# EAGLE board internal_env_board (EAGLE 8.4.0)
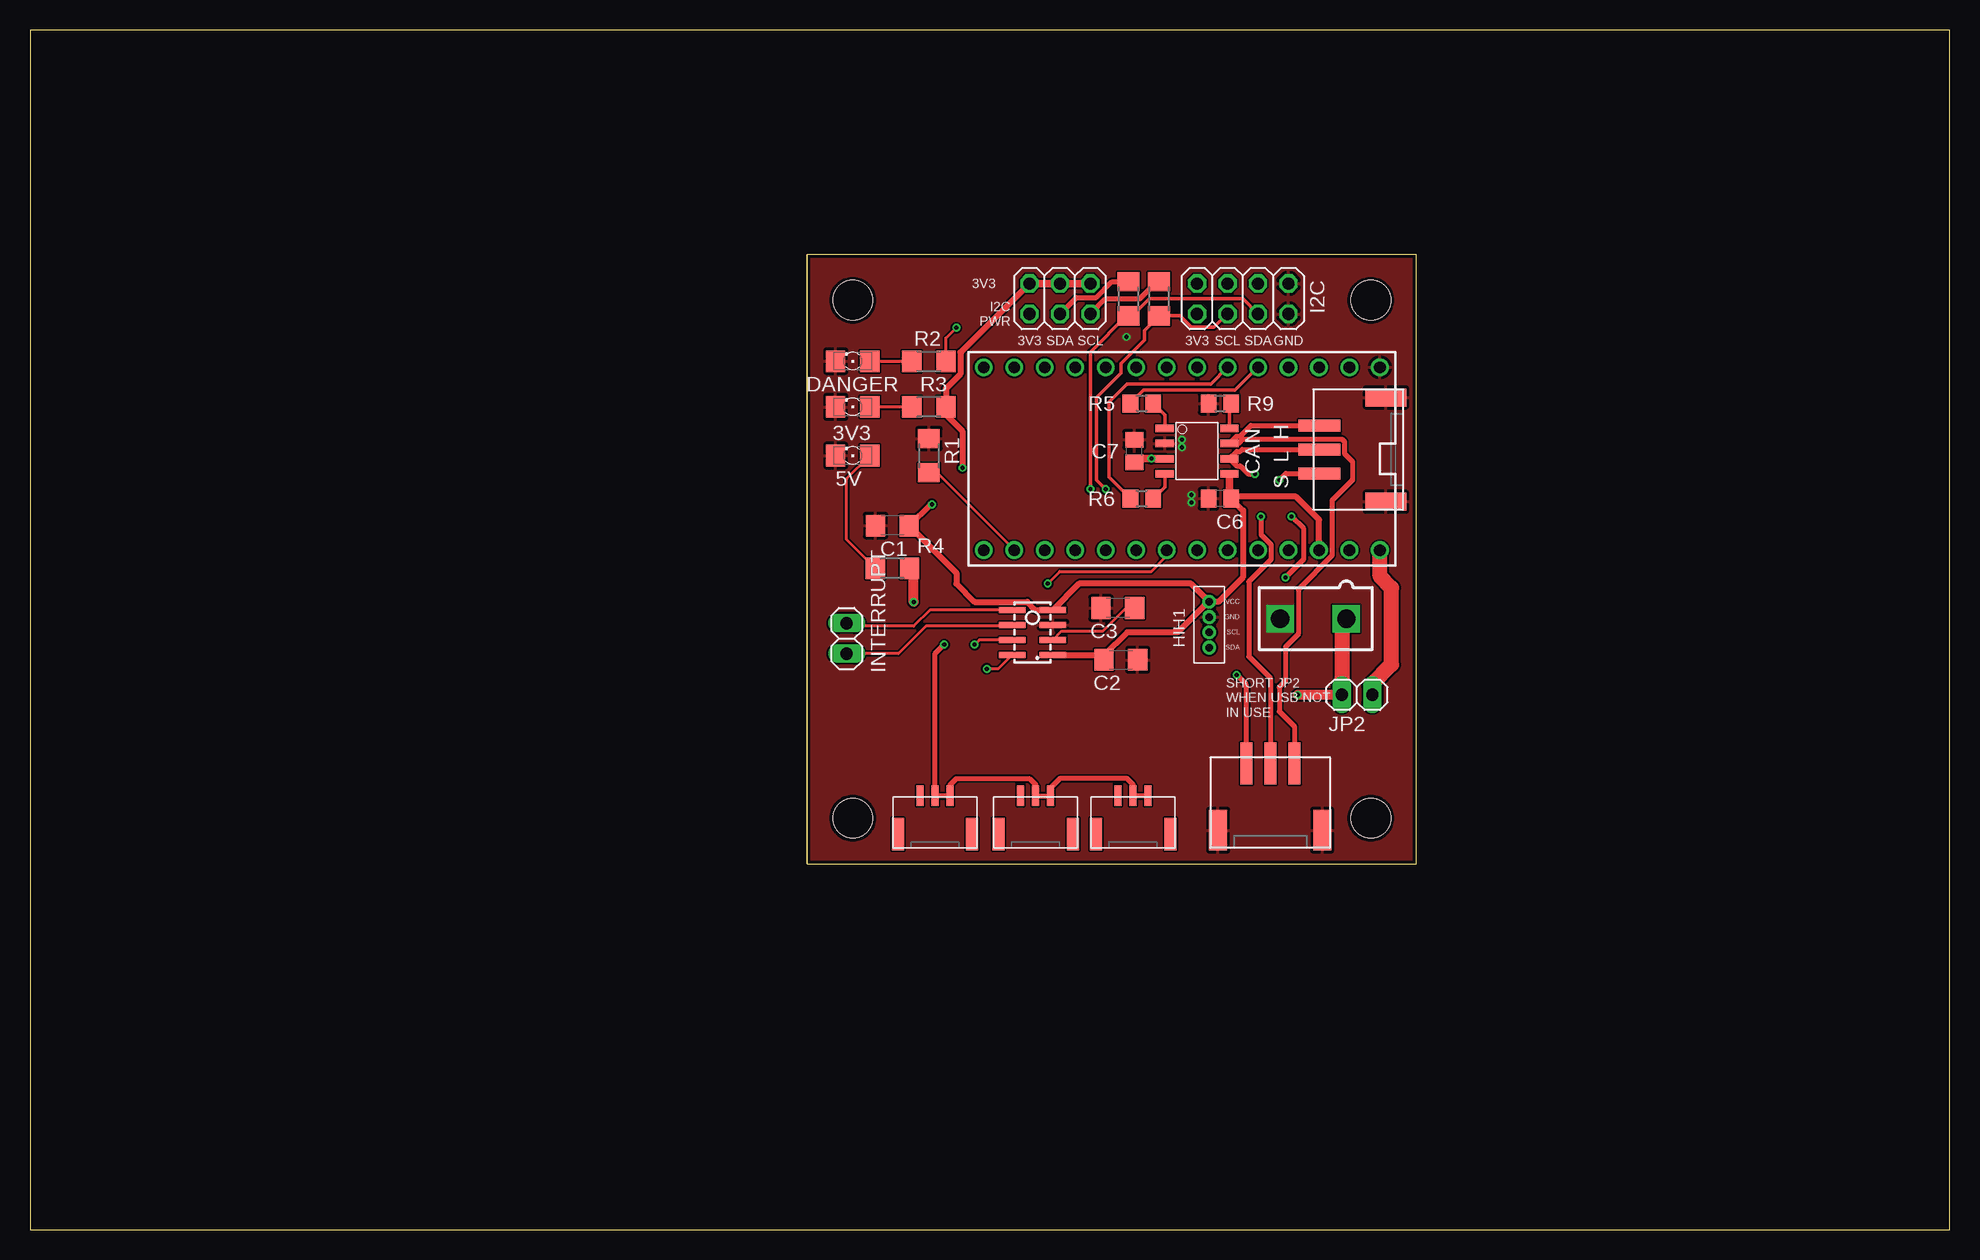
[diagram p0: board, top side]
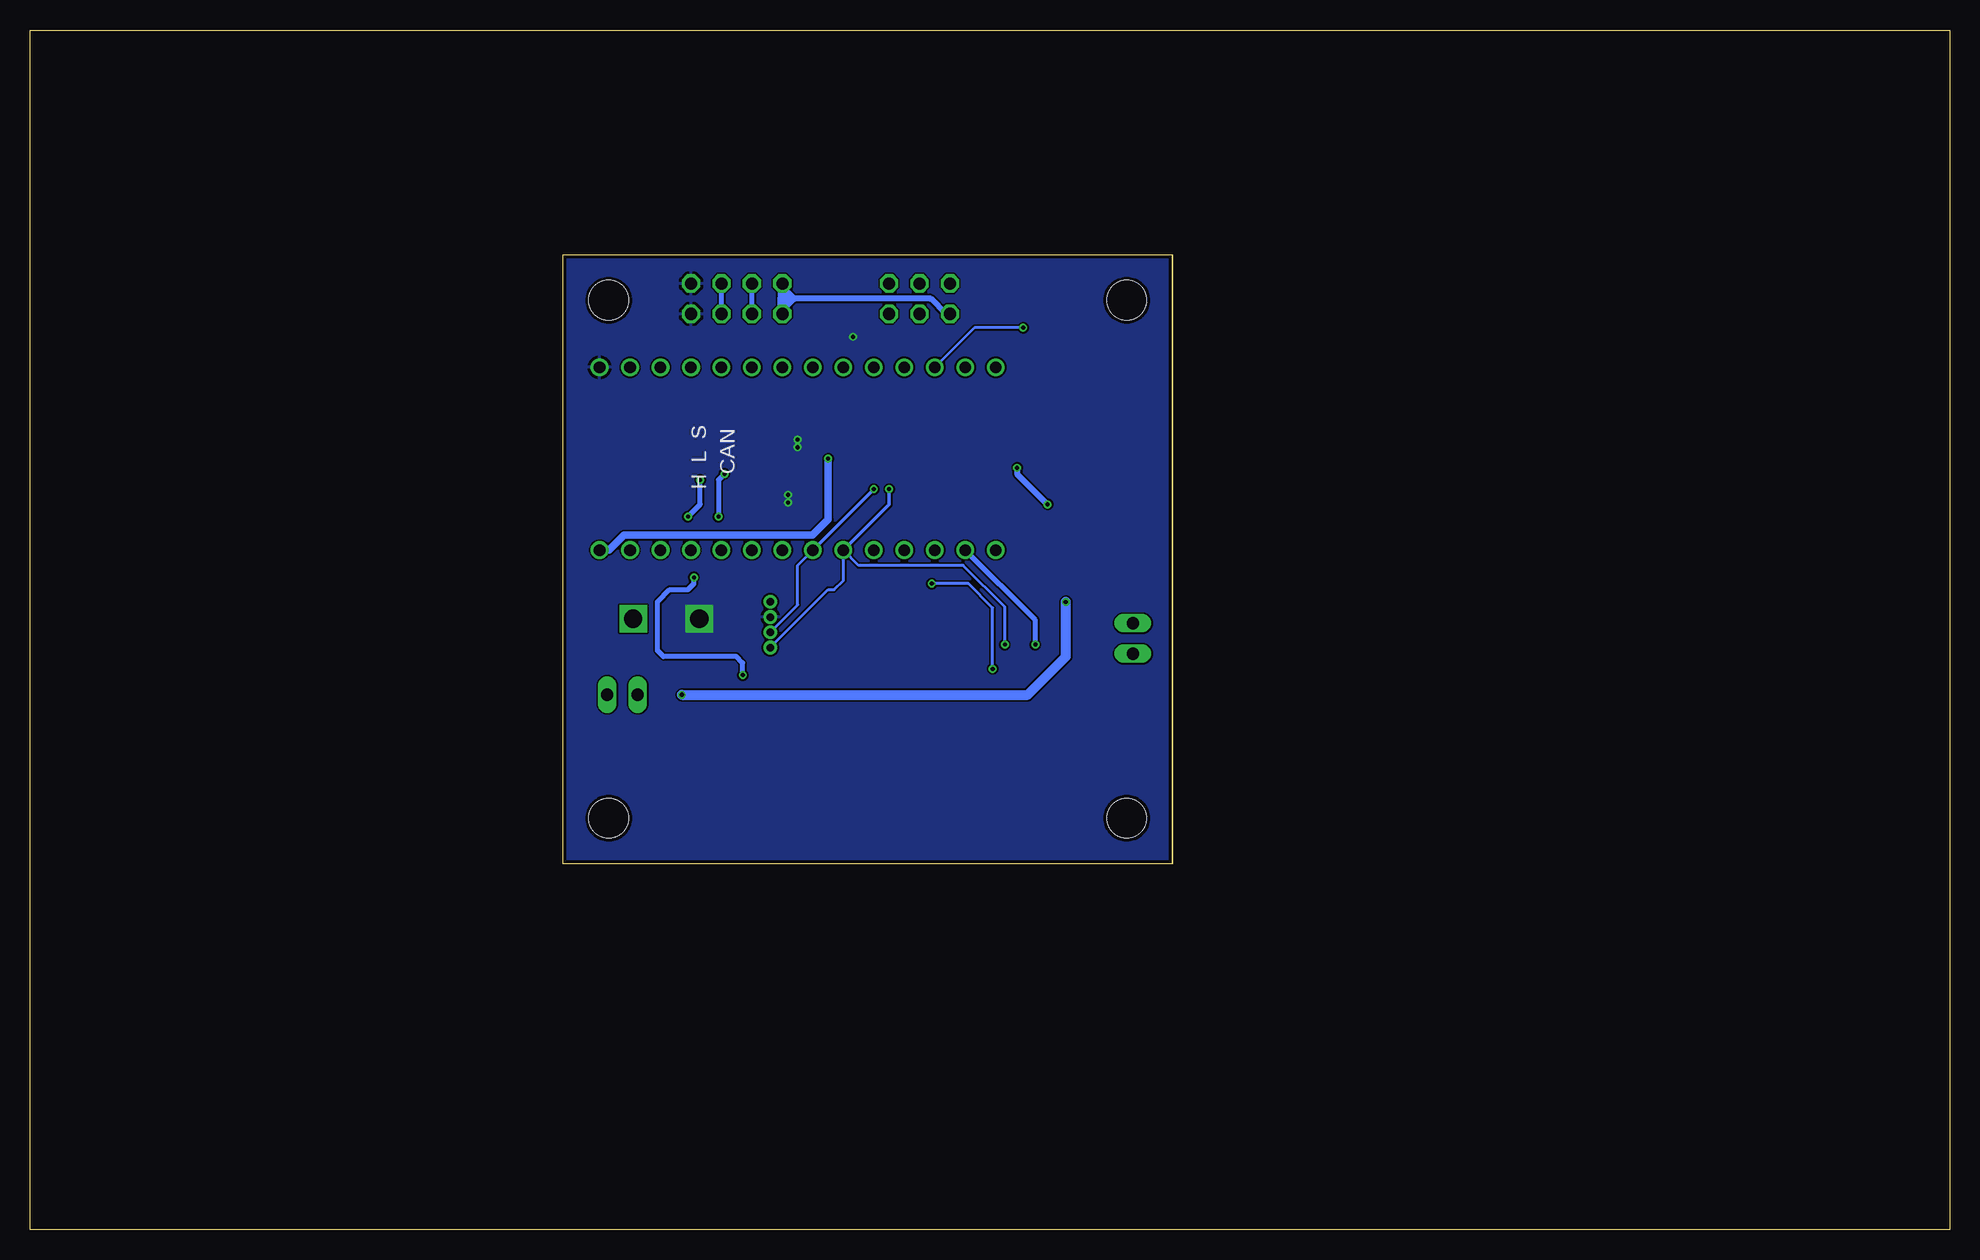
[diagram p1: board, bottom side, seen from below]

Size 160 x 100 mm. Coordinates in mm from the lower left corner, seen from the top.
Outline: 0,0 160,0 160,100 0,100 0,0
Outline: 64.77,30.48 115.57,30.48 115.57,81.28 64.77,81.28 64.77,30.48
Copper layers (1*16): Top 0.035mm / dielectric 1.5mm / Bottom 0.035mm
Design rules "ITEADstudioDRC": minimum track width 6mil, minimum drill 12mil, track to track 6mil, track to pad 6mil, pad to pad 6mil, via to via 6mil, smd to smd 0mil, copper to edge 10mil, drill to drill 10mil, minimum pad ring 10mil, minimum via ring 6mil, stop-mask expansion 2mil, vias tented up to drill 100mil, thermal gap 10mil
Net classes: 1 net1: clearance 0.203 mm to class 0
Milling: 4 lines

## Footprints (pad centres in the part's own frame; a part is rotated, then mirrored left to right if it is on the bottom)
1206 = smd 1.6 x 1.803: A -1.422,0; C 1.422,0
C1206 = smd 1.6 x 1.8: 1 -1.4,0; 2 1.4,0
C0805 = smd 1.3 x 1.5: 1 -0.95,0; 2 0.95,0
S3B-PH-SM4-TB = smd 1 x 3.5: P$1 -2,1.75; P$2 0,1.75; P$3 2,1.75 | smd 1.5 x 3.4: P$4 4.35,-3.8; P$5 -4.35,-3.8
SM03B-GHS-TB = smd 0.6 x 1.7: P$1 -1.25,0.85; P$2 0,0.85; P$3 1.25,0.85 | smd 1 x 2.7: P$4 -3.1,-2.35; P$5 3.1,-2.35
5566-2 = drill 1.524 square: 1 0,-2.756; 2 0,2.756
SIP4 = drill 0.635 pad 1.016: GND -1.27,0; SCL 0,0; SDA 1.27,0; VCC -2.54,0
1X02 = drill 1.016 long: 1 -1.27,0; 2 1.27,0
2X03 = drill 1.016 octagon: 1 -2.54,-1.27; 2 -2.54,1.27; 3 0,-1.27; 4 0,1.27; 5 2.54,-1.27; 6 2.54,1.27
2X04 = drill 1.016 octagon: 1 -3.81,-1.27; 2 -3.81,1.27; 3 -1.27,-1.27; 4 -1.27,1.27; 5 1.27,-1.27; 6 1.27,1.27; 7 3.81,-1.27; 8 3.81,1.27
R1206 = smd 1.6 x 1.803: 1 -1.422,0; 2 1.422,0
R0805 = smd 1.3 x 1.5: 1 -0.95,0; 2 0.95,0
TEENSY_3.1_BASIC_2 = drill 0.965: 0 -7.62,13.97; 1 -7.62,11.43; 2 -7.62,8.89; 3 -7.62,6.35; 3.3V 7.62,11.43; 4 -7.62,3.81; 5 -7.62,1.27; 6 -7.62,-1.27; 7 -7.62,-3.81; 8 -7.62,-6.35; 9 -7.62,-8.89; 10 -7.62,-11.43; 11 -7.62,-13.97; 12 -7.62,-16.51; 13 7.62,-16.51; 14/A0 7.62,-13.97; 15/A1 7.62,-11.43; 16/A2 7.62,-8.89; 17/A3 7.62,-6.35; 18/A4 7.62,-3.81; 19/A5 7.62,-1.27; 20/A6 7.62,1.27; 21/A7 7.62,3.81; 22/A8 7.62,6.35; 23/A9 7.62,8.89; AGND 7.62,13.97; GND -7.62,16.51; VIN 7.62,16.51
LGA8 = smd 2.2 x 0.5: 1 -1.7,1.875; 2 -1.7,0.625; 3 -1.7,-0.625; 4 -1.7,-1.875; 5 1.7,-1.875; 6 1.7,-0.625; 7 1.7,0.625; 8 1.7,1.875
SO-8 = smd 1.524 x 0.61: 1 -2.692,1.905; 2 -2.692,0.635; 3 -2.692,-0.635; 4 -2.692,-1.905; 5 2.692,-1.905; 6 2.692,-0.635; 7 2.692,0.635; 8 2.692,1.905
STAND-OFF = hole 3.302: 0,0

## Placement (x,y rotation side)
3V3  [1206]  68.58,68.58 180 top
5V  [1206]  68.58,64.52 180 top
C1  10uF  [C1206]  71.88,58.67 180 top
C2  100nF  [C1206]  90.93,47.5 0 top
C3  100nF  [C1206]  90.68,51.82 180 top
C6  10u  [C0805]  99.19,60.93 180 top
C7  10u  [C0805]  92.04,64.9 90 top
CON1  S3B-PH-SM4-TB  [S3B-PH-SM4-TB]  109.22,65.02 90 top
CON2  S3B-PH-SM4-TB  [S3B-PH-SM4-TB]  103.38,37.08 0 top
CON3  SM03B-GHS-TB  [SM03B-GHS-TB]  91.95,35.31 0 top
CON4  MOLEX_5566-2  [5566-2]  106.97,50.93 90 top
CON5  SM03B-GHS-TB  [SM03B-GHS-TB]  83.82,35.31 0 top
CON6  SM03B-GHS-TB  [SM03B-GHS-TB]  75.44,35.31 0 top
DANGER  [1206]  68.58,72.39 180 top
HIH1  HIH7120  [SIP4]  98.3,49.78 270 top
INTERRUPT  [1X02]  68.07,49.28 90 top
JP1  [2X03]  85.85,77.6 180 top
JP2  [1X02]  110.62,44.58 180 top
JP3  [2X04]  101.09,77.6 180 top
R1  80k  [R1206]  74.93,64.52 90 top
R2  51.1  [R1206]  74.93,72.39 180 top
R3  33.2  [R1206]  74.93,68.58 0 top
R4  51.1  [R1206]  71.88,55.12 0 top
R5  220  [R0805]  92.68,68.87 0 top
R6  220  [R0805]  92.68,60.93 0 top
R7  10k  [R1206]  91.57,77.6 270 top
R8  10k  [R1206]  94.11,77.6 270 top
R9  1k  [R0805]  99.19,68.87 0 top
U1  TEENSY_3.1_BASIC_2  [TEENSY_3.1_BASIC_2]  96.01,64.26 270 top
U2  MPL3115A2LGA8  [LGA8]  83.57,49.78 180 top
U4  TCAN1042HVDR  [SO-8]  97.28,64.9 0 top
U$5  [STAND-OFF]  111.76,34.29 0 top
U$6  [STAND-OFF]  68.58,34.29 0 top
U$7  [STAND-OFF]  68.58,77.47 0 top
U$8  [STAND-OFF]  111.76,77.47 0 top

## Library data of the parts
3V3 5V DANGER = adafruit
C1-C3 C6 C7 R5-R9 = rcl
CON1-CON6 U4 = ARVP
HIH1 = HIH7120
INTERRUPT JP1-JP3 = pinhead
R1-R4 = resistor
U1 = Teensy_3_Series_Board_v1.0
U2 = SparkFun-Sensors
U$5-U$8 = SparkFun

## Nets
+3V3: C1.1 C2.1 C6.1 HIH1.VCC JP1.1 JP1.3 JP1.5 R3.2 U1.3.3V U2.1 U2.4 U4.5
+5V: CON4.1 JP2.2 R4.2
AGND: U1.AGND
CAN_RX1: R6.2 U4.4
CAN_RX_T: R6.1 U1.4
CAN_TX2: R5.2 U4.1
CAN_TX_T: R5.1 U1.3
CANH1: CON1.P$3 CON2.P$3 U4.7
CANL1: CON1.P$2 CON2.P$2 U4.6
CAP: C3.1 U2.2
GND: 3V3.C 5V.C C1.2 C2.2 C3.2 C6.2 C7.2 CON1.P$4 CON1.P$5 CON2.P$4 CON2.P$5 CON4.2 DANGER.C HIH1.GND JP3.1 JP3.2 R1.2 R9.1 U1.GND U2.3 U4.2
I2C_3V1: JP1.6 JP3.7 JP3.8
INT1: INTERRUPT.1 U2.6
INT2: INTERRUPT.2 U2.5
LEAK_IN: CON3.P$2 CON3.P$3 CON5.P$2 CON5.P$3 CON6.P$2 CON6.P$3 R1.1 U1.14/A0
LED_D: R2.1 U1.10
N$1: CON1.P$1 CON2.P$1
N$2: DANGER.A R2.2
N$4: 5V.A R4.1
N$17: 3V3.A R3.1
SCL: HIH1.SCL JP3.5 JP3.6 R8.2 U1.19/A5 U2.8
SCL_3V1: JP1.2 R8.1
SDA: HIH1.SDA JP3.3 JP3.4 R7.2 U1.18/A4 U2.7
SDA_3V1: JP1.4 R7.1
STB1: R9.2 U4.8
VIN: C7.1 JP2.1 U1.VIN U4.3

## Tracks (layer width: path | path; a pad name or v marks a point on that pad's centre or on a via)
+3V3  (via drill 0.35)
  Top 0.508: C6.1 101.12,59.94 101.09,59.91 101.09,54.36 99.06,52.32 HIH1.VCC | HIH1.VCC 98.01,52.03 97.89,52.03 95.64,49.78 91.44,49.78 89.53,47.88 C2.1 89.12,47.91 U2.1 | HIH1.VCC 96.77,53.85 87.45,53.85 U2.4 83.79,51.66 83.13,52.31 78.75,52.31 77.22,53.85 77.22,54.74 C1.1 75.06,60.45 v75.18,60.45 | JP1.5 77.56,73.11 77.56,71.32 76.35,70.11 R3.2 76.35,67.92 77.72,66.55 v77.72,63.5 | 99.97,61.09 105.53,61.09 107.44,59.18 107.44,56.9
  Top 0.61: JP1.5 JP1.3 JP1.1 | 99.97,61.09 U4.5 | 99.97,61.09 C6.1 | 99.97,60.94 99.97,61.09 | 107.44,57.28 107.44,56.9 U1.3.3V
  Bottom 0.508: v77.72,63.5 77.72,62.99 v75.18,60.45
+5V  (via drill 0.35)
  Top 0.813: JP2.2 v105.66,44.58 | v73.66,52.32 73.66,54.76 R4.2
  Top 1.27: JP2.2 109.35,50.55 CON4.1
  Bottom 0.813: v73.66,52.32 73.66,47.75 76.83,44.58 v105.66,44.58
CAN_RX1
  Top 0.305: U4.4 94.59,61.89 R6.2
CAN_RX_T
  Top 0.305: U1.4 98.42,70.48 91.44,70.48 89.93,68.97 89.93,62.73 R6.1
CAN_TX2
  Top 0.305: U4.1 94.59,67.9 R5.2
CAN_TX_T
  Top 0.305: U1.3 100.45,69.97 92.83,69.97 92.62,69.76 R5.1
CANH1
  Top 0.406: CON1.P$3 101.77,67.02 100.88,66.14 100.58,66.14 U4.7 100.75,65.53 101.1,65.88 109.37,65.88 109.58,65.67 109.58,64.67 110.24,64.01 110.24,62.48 108.53,60.78 108.53,56.19 105.71,53.36 105.71,49.64 104.65,48.58 104.65,45.72 104.14,45.21 104.14,43.18 105.38,41.94 CON2.P$3
CANL1  (via drill 0.35)
  Top 0.406: CON1.P$2 101.04,65.02 100.88,64.87 100.58,64.87 U4.6 100.58,63.65 100.88,63.65 101.54,62.99 v102.11,62.99 | v102.62,59.44 102.62,57.93 103.45,57.09 103.45,55.86 101.6,54 101.6,47.75 103.38,45.97 CON2.P$2
  Bottom 0.406: v102.11,62.99 102.62,62.48 v102.62,59.44
CAP
  Top 0.254: U2.2 85.99,49.88 89.44,49.88 91.37,51.82 C3.1
GND  (via drill 0.35)
  other vias: 96.81,61.25 96.81,60.61 96.01,65.85 96.01,65.21 91.41,74.42
  pour Bottom (rank 2): 65.09,30.8 115.25,30.8 115.25,80.96 65.09,80.96
  pour Top (rank 3): 65.09,30.8 115.25,30.8 115.25,80.96 65.09,80.96
  pour Top (no thermals): 106.33,49.5 106.33,52.36 102.2,52.36 102.2,49.5
  pour Bottom (no thermals): 106.33,49.5 106.33,52.36 102.2,52.36 102.2,49.5
I2C_3V1
  Bottom 0.508: JP1.6 83.63,76.33 84.9,77.6 97.28,77.6 | 97.28,78.55 96.33,77.6 97.28,76.64
  Bottom 0.813: JP3.7 97.28,78.55 97.28,77.6 97.28,76.64 JP3.8
INT1
  Top 0.254: U2.6 81.75,50.29 74.68,50.29 72.39,48.01 INTERRUPT.1
INT2
  Top 0.254: U2.5 75.03,51.66 73.66,50.29 68.33,50.29 INTERRUPT.2
LEAK_IN  (via drill 0.35)
  Top 0.254: 75.59,63.09 U1.14/A0
  Top 0.406: CON3.P$3 CON3.P$2 91.95,37.08 91.44,37.59 85.85,37.59 85.07,36.81 CON5.P$3 CON5.P$2 83.82,37.08 83.31,37.59 77.22,37.59 76.69,37.06 CON6.P$3 CON6.P$2 75.44,48.01 v76.2,48.77
  Top 0.508: R1.1 75.59,63.09
  Bottom 0.406: v76.2,48.77 76.2,50.8 U1.14/A0
LED_D  (via drill 0.35)
  Top 0.254: R2.1 76.35,74.32 v77.22,75.18
  Bottom 0.254: v77.22,75.18 81.28,75.18 U1.10
N$1  (via drill 0.35)
  Top 0.406: CON2.P$1 101.38,45.43 v100.58,46.23 | v104.65,54.36 106.17,55.88 106.17,58.42 v105.16,59.44 | CON1.P$1 104.68,63.02 v104.14,62.48
  Bottom 0.406: v100.58,46.23 100.58,47.24 101.09,47.75 107.19,47.75 107.7,48.26 107.7,52.32 106.68,53.34 105.16,53.34 104.65,53.85 v104.65,54.36 | v105.16,59.44 104.14,60.45 v104.14,62.48
N$2
  Top 0.254: DANGER.A R2.2
N$4
  Top 0.254: R4.1 68.07,57.51 68.07,62.59 5V.A
N$17
  Top 0.254: R3.1 3V3.A
SCL  (via drill 0.35)
  Top 0.254: U2.8 80.69,46.74 v79.76,46.74 | v84.84,53.85 85.85,54.86 93.47,54.86 94.74,56.13 U1.19/A5
  Top 0.305: v89.66,61.72 88.9,62.48 88.9,69.37 90.93,71.41 90.93,72.19 92.89,74.14 92.89,74.95 R8.2 95.85,76.17 96.82,75.21 98.7,75.21 JP3.6
  Bottom 0.254: HIH1.SCL 96.01,52.07 96.01,55.37 U1.19/A5 | v79.76,46.74 79.76,51.82 81.79,53.85 v84.84,53.85
  Bottom 0.305: U1.19/A5 v89.66,61.72
  Bottom 0.406: JP3.6 JP3.5
SCL_3V1
  Top 0.406: JP1.2 89.66,77.6 92.52,77.6 93.94,79.02 R8.1
SDA  (via drill 0.35)
  Top 0.254: U2.7 79.13,49.16 v78.74,48.77
  Top 0.305: v88.39,61.72 88.39,73.15 91.42,76.17 R7.2 91.89,76.17 93.31,77.6 101.09,77.6 JP3.4
  Bottom 0.254: v78.74,48.77 78.74,51.9 82.21,55.37 90.93,55.37 U1.18/A4 92.2,54.1 92.96,53.34 93.47,53.34 HIH1.SDA
  Bottom 0.305: v88.39,61.72 88.39,60.45 U1.18/A4
  Bottom 0.406: JP3.4 JP3.3
SDA_3V1
  Top 0.406: JP1.4 87.22,77.7 88.88,77.7 90.2,79.02 R7.1
STB1
  Top 0.305: R9.2 99.97,68.7 U4.8
VIN  (via drill 0.35)
  Top 0.61: C7.1 92.2,64.26 v93.47,64.26 U4.3 94.74,64.26
  Top 1.27: JP2.1 111.89,45.49 113.49,47.09 113.49,53.49 112.52,54.46 U1.VIN
  Bottom 0.61: U1.VIN 111.74,56.64 110.5,57.89 94.77,57.89 93.47,59.18 v93.47,64.26

## Text on the board
tNames: 3V3 | I2C | I2C / PWR | 3V3 | SDA | SCL | 3V3 | SCL | SDA | GND | H | CAN | L | S | SHORT JP2 / WHEN USB NOT / IN USE
bNames: S | CAN | L | H
Document: Assumptions: this board is installed in right/rear or left/front section of robot. / Teensy USB connector and CAN terminal should point towards the center of hull. / Mounting holes come from Sparkfun library, located in projects folder. / Layout can be changed if needed, as long as USB and CAN guidelines are followed. | Assumptions: this board is installed in right/rear or left/front section of robot. / Teensy USB connector and CAN terminal should point towards the center of hull. / Mounting holes come from Sparkfun library, located in projects folder. / Layout can be changed if needed, as long as USB and CAN guidelines are followed. | Towards acrylic wall | Towards middle of robot | Bottom